# Altium PCB final test with protection.PcbDoc
Units mm, origin at the board's own origin, x right, y up, seen from the top; angles counter-clockwise.
Board outline 152.4 x 101.6 mm, 2 copper layers (Top Layer, Bottom Layer); 12 components, 11 nets, 39 pads, 0 vias.
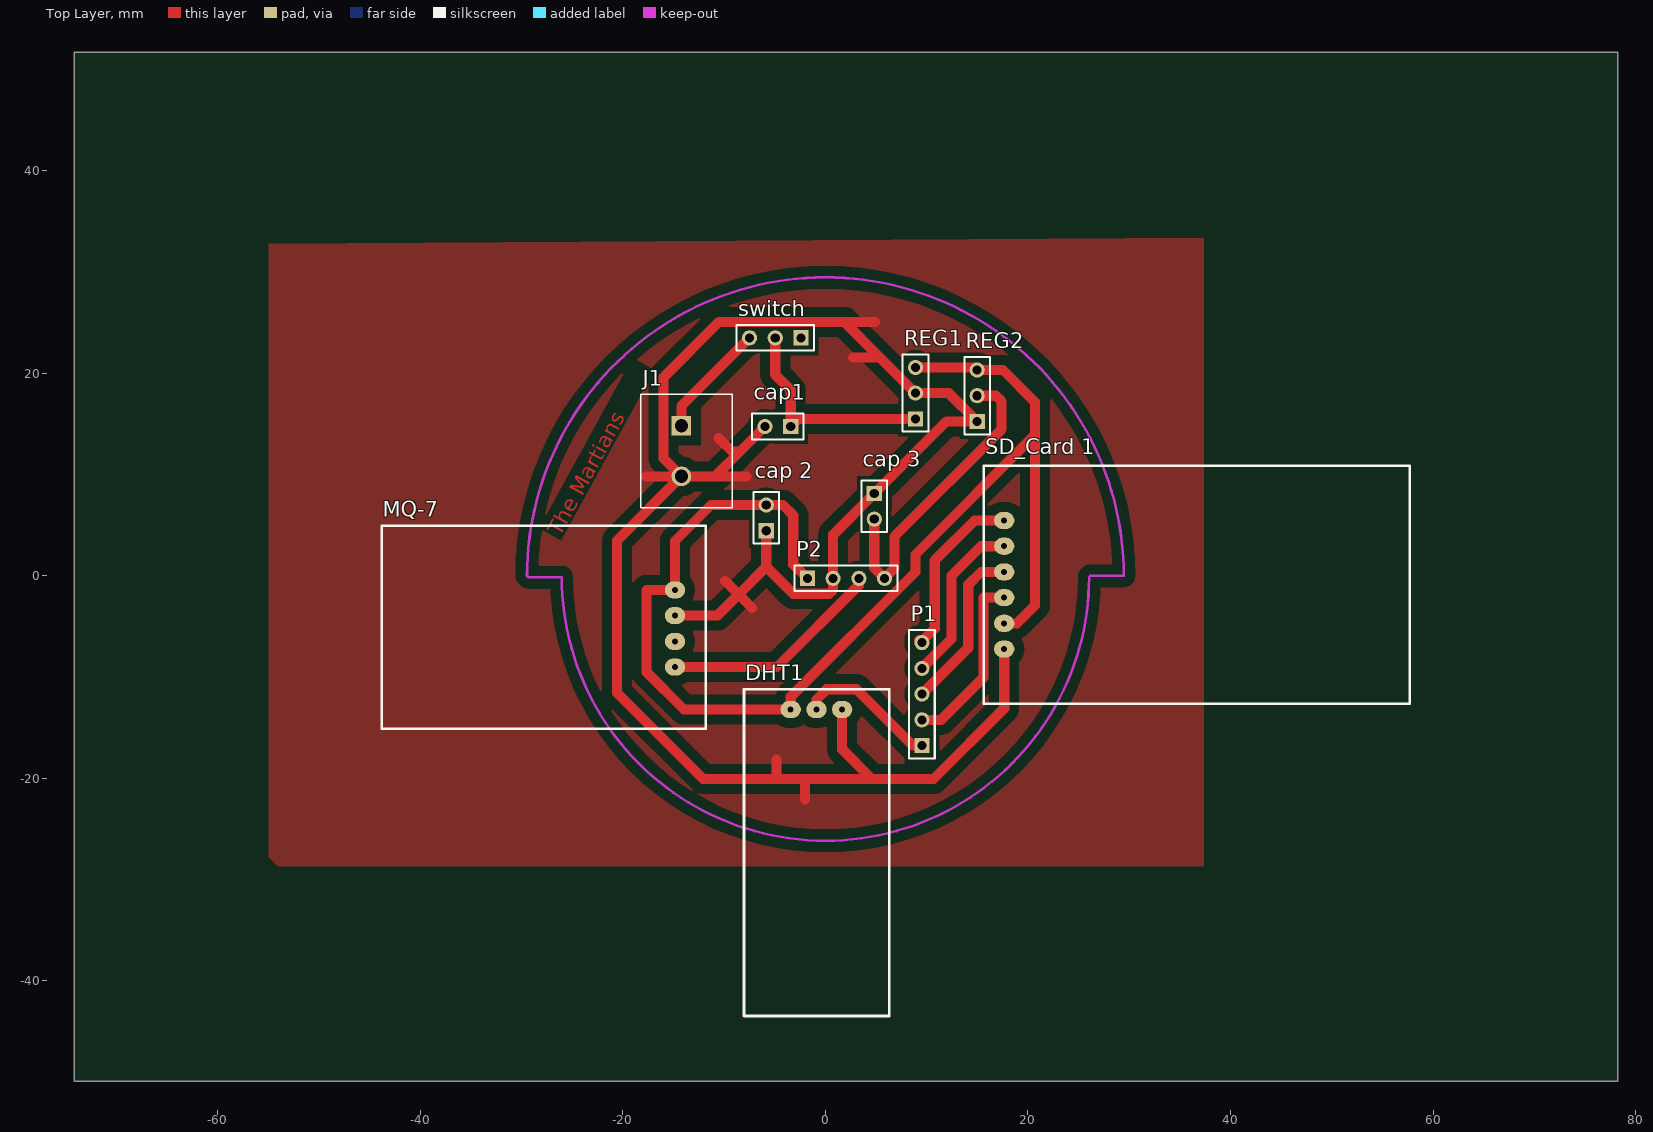
[diagram p0: Top Layer view]
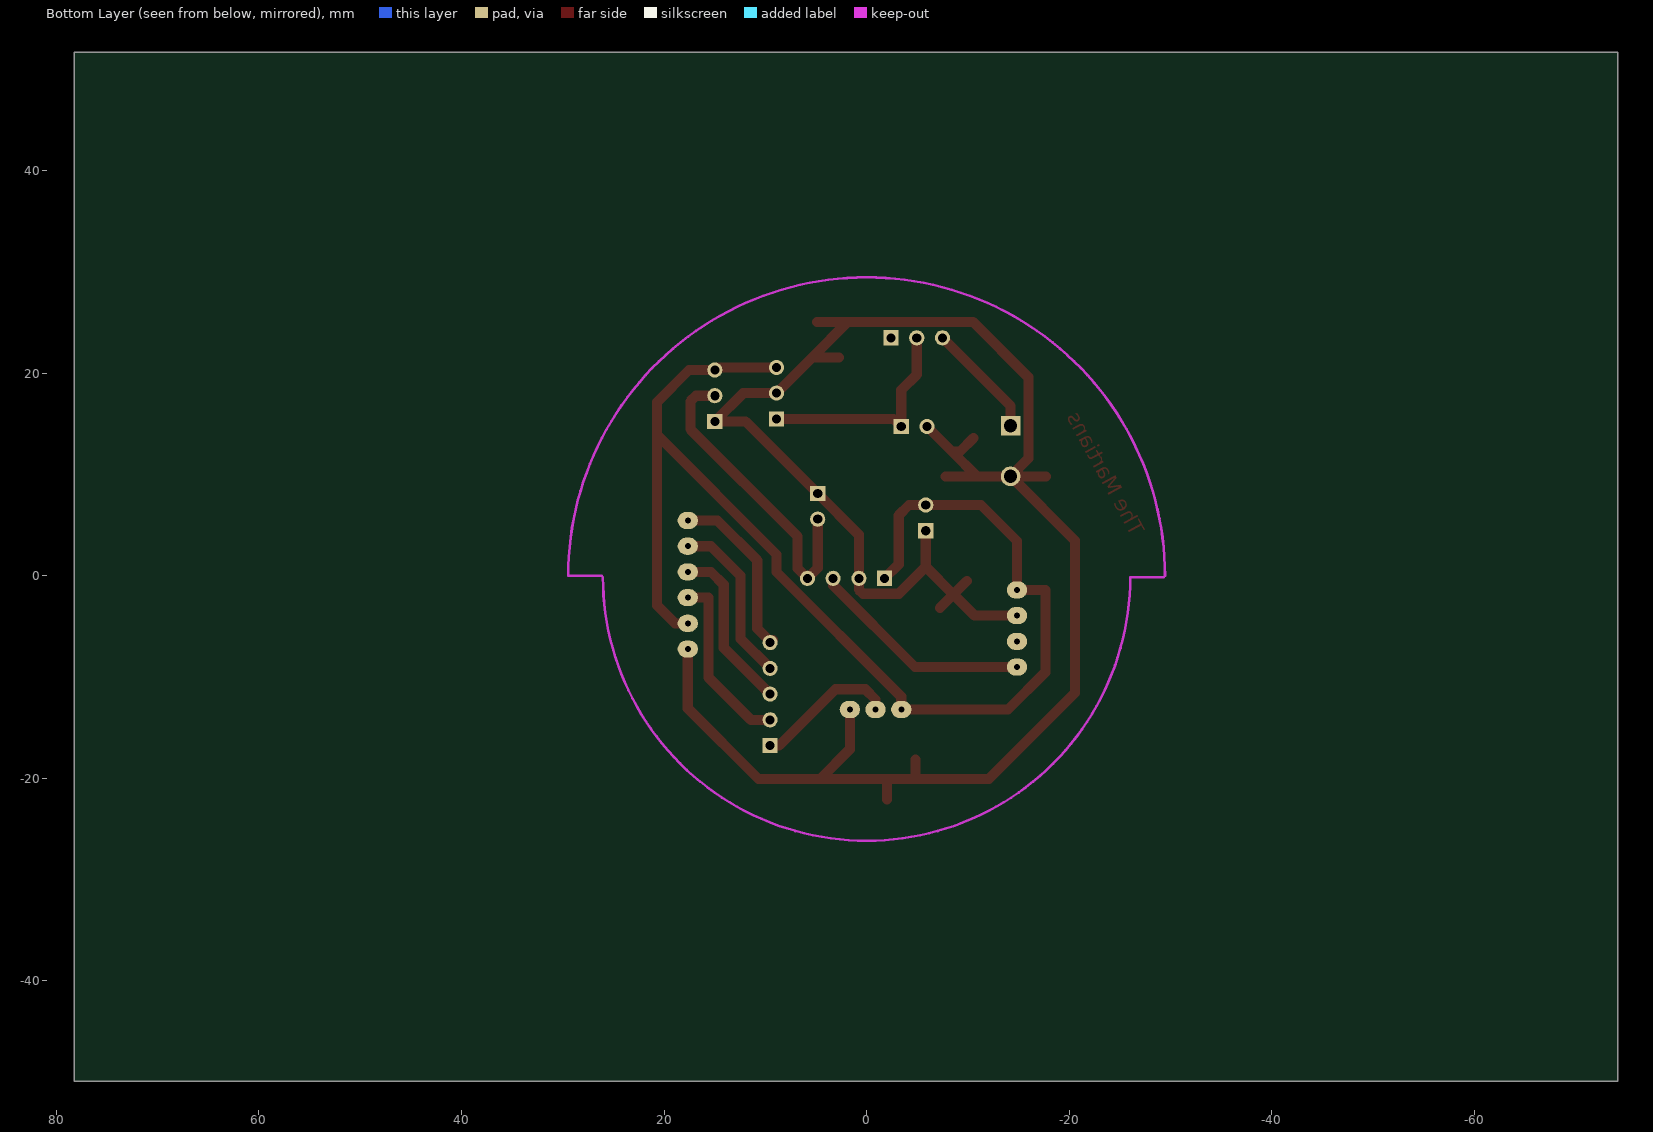
[diagram p1: Bottom Layer view, seen from below]

## Layer stack, top to bottom
Top Solder: solder mask 0.0102, Solder Resist, Dk 3.5
Top Layer: signal copper 0.0356
Dielectric 1: dielectric 0.32, FR-4, Dk 4.8
Bottom Layer: signal copper 0.0356
Bottom Solder: solder mask 0.0102, Solder Resist, Dk 3.5

## Board outline
-74.168,-49.911 78.232,-49.911 78.232,51.689 -74.168,51.689

## Design rules (kind name [scope] priority, off if disabled: settings)
Clearance [All] p1: gap=0.254 ignorepadtopadclearanceinfootprint=FALSE except(0: Arc-Hole Track-Hole SMDPad-Hole THPad-Hole Via-Hole Fill-Hole Poly-Hole Region-Hole Text-Hole; 1: Arc-Fill Arc-Poly Arc-Region Track-Fill Track-Poly Track-Region SMDPad-Fill SMDPad-Poly SMDPad-Region THPad-Fill THPad-Poly THPad-Region Via-Fill Via-Poly Via-Region Fill-Fill Fill-Poly Fill-Region Poly-Poly Poly-Region Region-Region)
PolygonConnect [All] p1: connectstyle=Relief reliefconductorwidth=0.254 reliefentries=4 polygonreliefangle="90 Angle" airgapwidth=0.254
RoutingLayers [All] p1: top layer_v5=TRUE bottom layer_v5=FALSE
RoutingVias [All] p1: holewidth=0.711 width=1.27 viastyle="Through Hole" minholewidth=0.711 minwidth=1.27 maxholewidth=0.711 maxwidth=1.27
SolderMaskExpansion [All] p1: expansion=0.102
Width [All] p1: maxlimit=1 minlimit=0.7 preferedwidth=1 bottomlayer_minwidth=1 minimp=50.000000 maximp=50.000000 favimp=50.000000
29 further rules are at their usual default settings.

## Components (designator, comment, footprint, x,y, rotation, side; value= is the part's Value field where it differs from the comment)
cap1 "Header 2" HDR1X2 -3.429,14.732 r180 top
"cap 2" "Header 2" HDR1X2 -5.842,4.445 r90 top
"cap 3" "Header 2" HDR1X2 4.826,8.128 r270 top
DHT1 "DHT" PCBComponent_1 -8.039,-11.208 r90 top
J1 "OSTTA020161" *OST_OSTTA020161 -14.224,12.319 r270 top
MQ-7 "MQ-7" MQ-7 -11.811,-5.207 r0 top
P1 "Header 5" HDR1X5 9.525,-16.764 r90 top
P2 "Header 4" HDR1X4 -1.778,-0.254 r0 top
REG1 "Header 3" HDR1X3 8.89,15.494 r90 top
REG2 "Header 3" HDR1X3 14.986,15.24 r90 top
"SD_Card 1" "SD_Card" SD_Card 15.653,-0.889 r270 top
switch "Header 3" HDR1X3 -2.413,23.495 r180 top

## Footprints (in the part's own frame and the unit in brackets; to place one, negate y for a bottom-side part, rotate by r counter-clockwise, add the part's x,y. Pads: shape width x height; smd on the part's side, far side on the other; paste and mask are expansions set on the pad)
*OST_OSTTA020161 [mm]
  rect 1.95x1.95 hole 1.3: 1(-2.5,0)
  round 1.95 hole 1.3: 2(2.5,0)
  silkscreen extent -5.6,-4 5.6,5
HDR1X2 [mm] "Connector; Header; 2 Position"
  rect 1.5x1.5 hole 0.9: 1(0,0)
  round 1.5 hole 0.9: 2(2.54,0)
  silkscreen extent -1.27,-1.27 3.81,1.27
HDR1X3 [mm] "Connector; Header; 3 Position"
  rect 1.5x1.5 hole 0.9: 1(0,0)
  round 1.5 hole 0.9: 2(2.54,0) 3(5.08,0)
  silkscreen extent -1.27,-1.27 6.35,1.27
HDR1X4 [mm] "Connector; Header; 4 Position"
  rect 1.5x1.5 hole 0.9: 1(0,0)
  round 1.5 hole 0.9: 2(2.54,0) 3(5.08,0) 4(7.62,0)
  silkscreen extent -1.27,-1.27 8.89,1.27
HDR1X5 [mm] "Connector; Header; 5 Position"
  rect 1.5x1.5 hole 0.9: 1(0,0)
  round 1.5 hole 0.9: 2(2.54,0) 3(5.08,0) 4(7.62,0) 5(10.16,0)
  silkscreen extent -1.27,-1.27 11.43,1.27
MQ-7 [mm]
  oval 2x1.7 hole 0.6: 43(-3.048,3.81) 44(-3.048,1.27) 45(-3.048,-1.27) 46(-3.048,-3.81)
  silkscreen extent -32,-9.91 0,10.16
PCBComponent_1 [mm]
  oval 1.7x2 hole 0.6: 9(-2,-4.61) 10(-2,-7.15) 11(-2,-9.69)
  silkscreen extent -32.26,-14.35 0,0
SD_Card [mm]
  oval 1.7x2 hole 0.6: 37(6.35,2) 38(3.81,2) 39(1.27,2) 40(-1.27,2) 41(-3.81,2) 42(-6.35,2)
  silkscreen extent -11.75,0 11.75,42.04

## Part data
cap1 "cap 2" "cap 3": "Header, 2-Pin", LatestRevisionDate=17-Jul-2002, LatestRevisionNote="Re-released for DXP Platform.", Publisher="Altium Limited"
J1: "Connector Terminal Blocks 2 Position 5mm Solder Straight Thru-Hole 16A", Package=None, Availability=Unavailable, MF="On Shore", MP=OSTTA020161, Price=None, SnapEDA_Link=https://www.snapeda.com/parts/OSTTA020161/On%20Shore%20Technology%20Inc./view-part/?ref=snap
P1: "Header, 5-Pin", LatestRevisionDate=17-Jul-2002, LatestRevisionNote="Re-released for DXP Platform.", Publisher="Altium Limited"
P2: "Header, 4-Pin", LatestRevisionDate=17-Jul-2002, LatestRevisionNote="Re-released for DXP Platform.", Publisher="Altium Limited"
REG1 REG2 switch: "Header, 3-Pin", LatestRevisionDate=17-Jul-2002, LatestRevisionNote="Re-released for DXP Platform.", Publisher="Altium Limited"

## Nets (pads, with @x,y where several pads share a name; then routed paths per layer and width w, separated by ;. In a path a pad name is that pad's centre, name@x,y a point inside that pad or via, vN(x,y) a via of type N, cw(c..) or ccw(c..) an arc to the next point about the centre after c; other vN are vias at no path point)
Netcap1_1: cap1.1 REG1.1 switch.2 | length 22
  Top Layer w1: switch.2 -4.953,19.863 -3.429,18.339 cap1.1 -2.667,15.494 REG1.1
Netcap1_2: "cap 2.1" "cap 3.1" "SD_Card 1.37" cap1.2 DHT1.11 J1.2 MQ-7.44 P2.2 REG1.2 REG2.1 | length 210.1
  Top Layer w1: -17.693,9.819 J1.2 ; MQ-7.44 -10.668,-3.937 -8.763,-2.032 -8.763,-1.651 ; -10.541,13.589 -9.227,12.275 -8.426,12.275 ; -9.906,-0.508 -8.763,-1.651 ; -7.787,9.819 -10.882,9.819 ; -7.239,-3.175 -8.572,-1.841 ; cap1.2 -8.426,12.275 ; -5.842,4.445 -5.842,0.889 ; -4.826,-18.161 -4.826,-20.066 ; -2.032,-22.098 -2.032,-20.066 ; DHT1.11 1.651,-17.145 4.572,-20.066 ; 2.705,21.552 5.372,21.552 ; 4.877,25.07 1.854,25.07 ; 17.653,-7.239 17.653,-13.081 10.668,-20.066 4.572,-20.066 ; J1.2 -20.574,3.469 -20.574,-11.55 -12.058,-20.066 -4.826,-20.066 ; J1.2 -15.977,11.572 -15.977,19.609 -10.516,25.07 1.854,25.07 ; J1.2 -10.882,9.819 ; -10.882,9.819 -8.426,12.275 ; -8.763,-1.651 -8.572,-1.841 ; -8.572,-1.841 -5.842,0.889 ; -5.842,0.889 -3.175,-1.778 0.356,-1.778 0.762,-1.372 P2.2 0.762,4.064 4.826,8.128 11.938,15.24 REG2.1 12.192,18.034 REG1.2 5.372,21.552 ; -4.826,-20.066 -2.032,-20.066 ; -2.032,-20.066 4.572,-20.066 ; 1.854,25.07 5.372,21.552
"Netcap 2_2": "cap 2.2" "SD_Card 1.38" DHT1.9 MQ-7.43 P2.1 REG1.3 REG2.3 | length 126.1
  Top Layer w1: P2.1 -3.175,1.143 -3.175,5.969 -4.191,6.985 -5.842,6.985 -11.303,6.985 -14.859,3.429 MQ-7.43 -17.653,-1.397 -17.653,-9.525 -13.97,-13.208 DHT1.9 -3.429,-11.938 8.89,0.381 8.89,2.108 20.701,13.919 ; REG1.3 14.732,20.574 REG2.3 17.526,20.32 20.701,17.145 20.701,13.919 ; 17.653,-4.699 18.923,-4.699 20.701,-2.921 20.701,13.919
"Netcap 3_2": "cap 3.2" P2.4 REG2.2 | length 31.2
  Top Layer w1: 4.826,5.588 4.826,0.762 P2.4 6.805,0.709 6.805,3.884 17.399,14.478 17.399,17.226 16.845,17.78 REG2.2
NetDHT1_10: DHT1.10 P1.1 | length 14.1
  Top Layer w1: DHT1.10 -0.889,-12.217 0.127,-11.201 3.073,-11.201 8.636,-16.764 P1.1
NetJ1_1: J1.1 switch.3 | length 11.5
  Top Layer w1: J1.1 -14.224,16.764 switch.3
NetMQ-7_46: MQ-7.46 P2.3 | length 22.2
  Top Layer w1: MQ-7.46 -4.776,-9.017 3.302,-0.939 P2.3
NetP1_2: "SD_Card 1.39" P1.2 | length 17.7
  Top Layer w1: P1.2 11.43,-14.224 15.621,-10.033 15.621,-2.159 17.653,-2.159
NetP1_3: "SD_Card 1.40" P1.3 | length 16.8
  Top Layer w1: P1.3 14.097,-7.112 14.097,-0.889 15.367,0.381 17.653,0.381
NetP1_4: "SD_Card 1.41" P1.4 | length 16.8
  Top Layer w1: P1.4 12.446,-6.223 12.446,0 15.367,2.921 17.653,2.921
NetP1_5: "SD_Card 1.42" P1.5 | length 17.6
  Top Layer w1: P1.5 9.271,-6.35 9.652,-6.35 10.795,-5.207 10.795,1.524 14.732,5.461 17.653,5.461
pads on no net: MQ-7.45 switch.1

## Polygon pours and split planes (outlines as drawn)
no net on Top Layer "Top Layer-No Net" (solid, pour order 16): 37.338,33.401 37.338,-28.702 -54.102,-28.702 -54.991,-27.813 -54.991,32.766

## Keep-outs
Keep-Out Layer:
  lines w0.254: -29.464,0 cw(c0,0) 29.464,0 26.162,0 ; -29.337,-0.127 -26.035,-0.127 ccw(c0,-0.132) 26.035,-0.127

## Other copper
Top Layer:
  text "The Martians" at -26.162,3.81 h1.52 r61.39